# Altium PCB PCB.PcbDoc
Units mm, origin at the board's own origin, x right, y up, seen from the top; angles counter-clockwise.
Board outline 53.47 x 71.88 mm, 2 copper layers (Top Layer, Bottom Layer); 75 components, 43 nets, 242 pads, 39 vias.
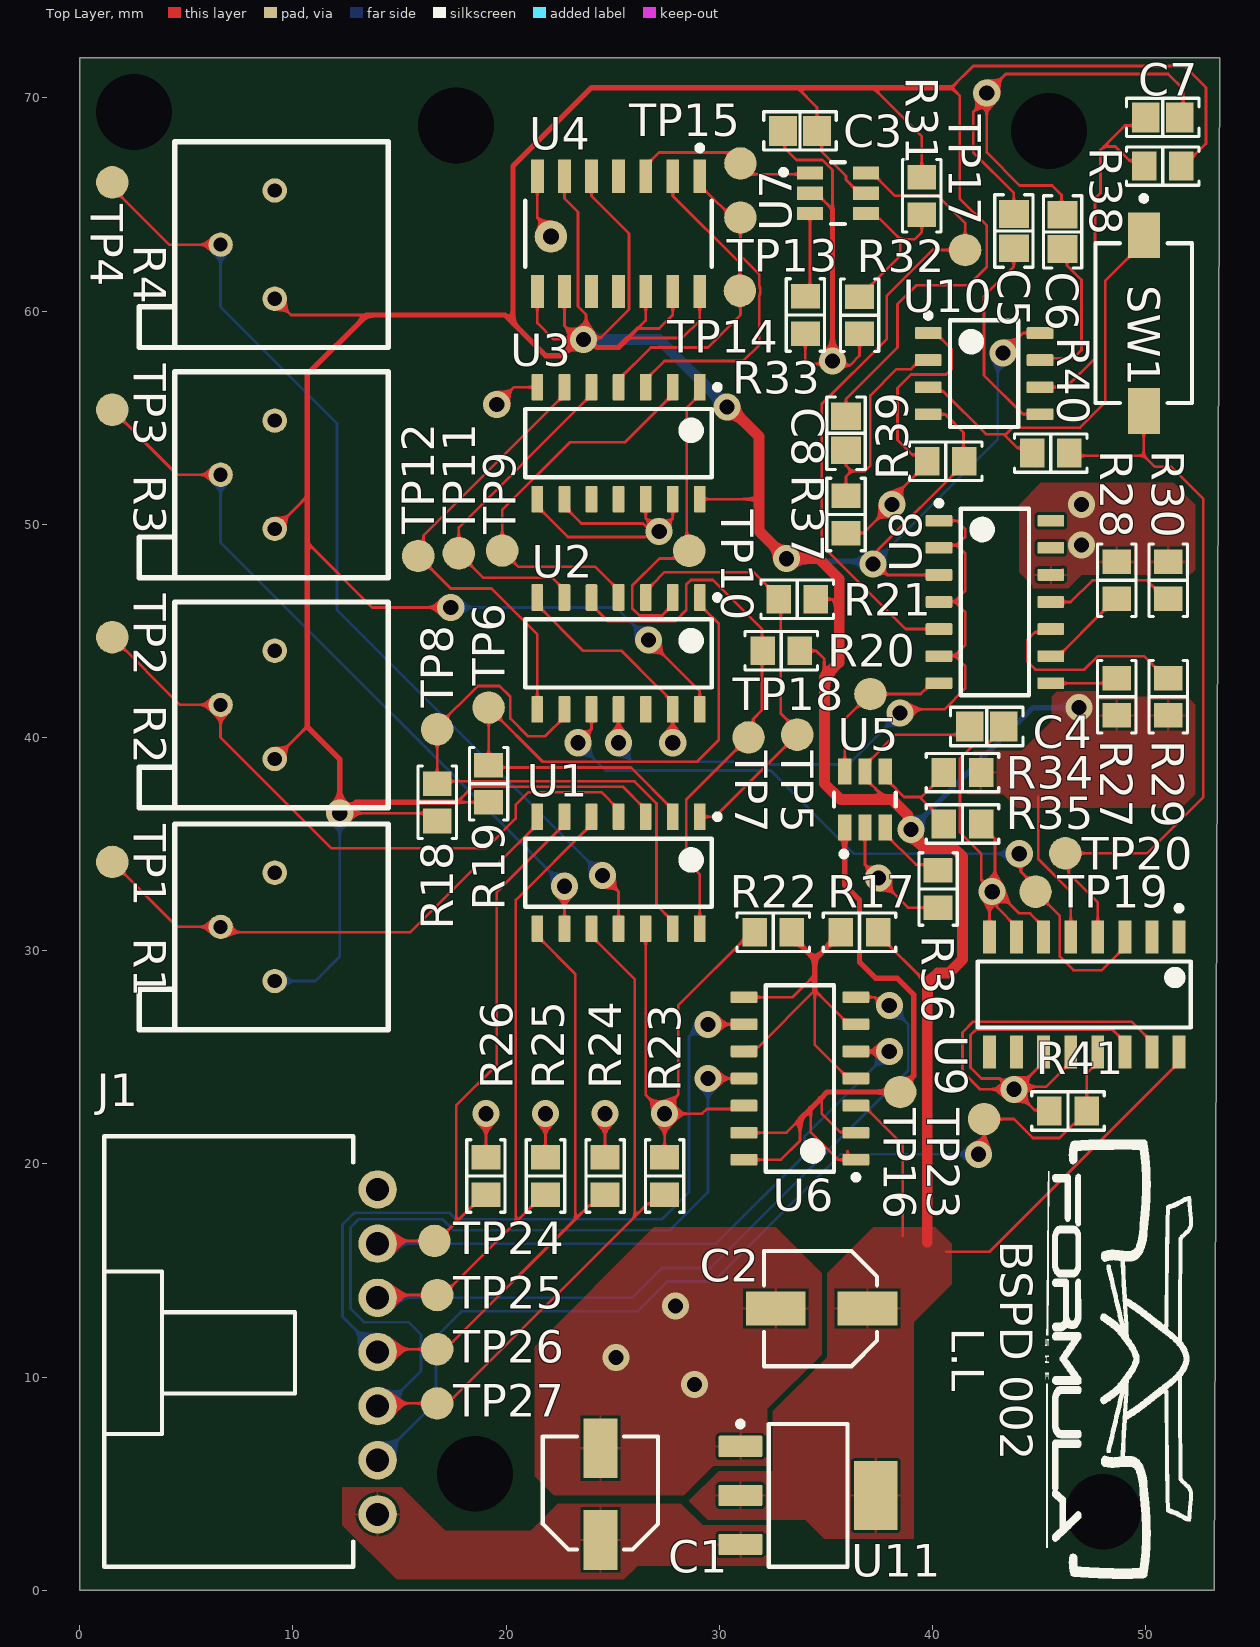
[diagram p0: Top Layer view]
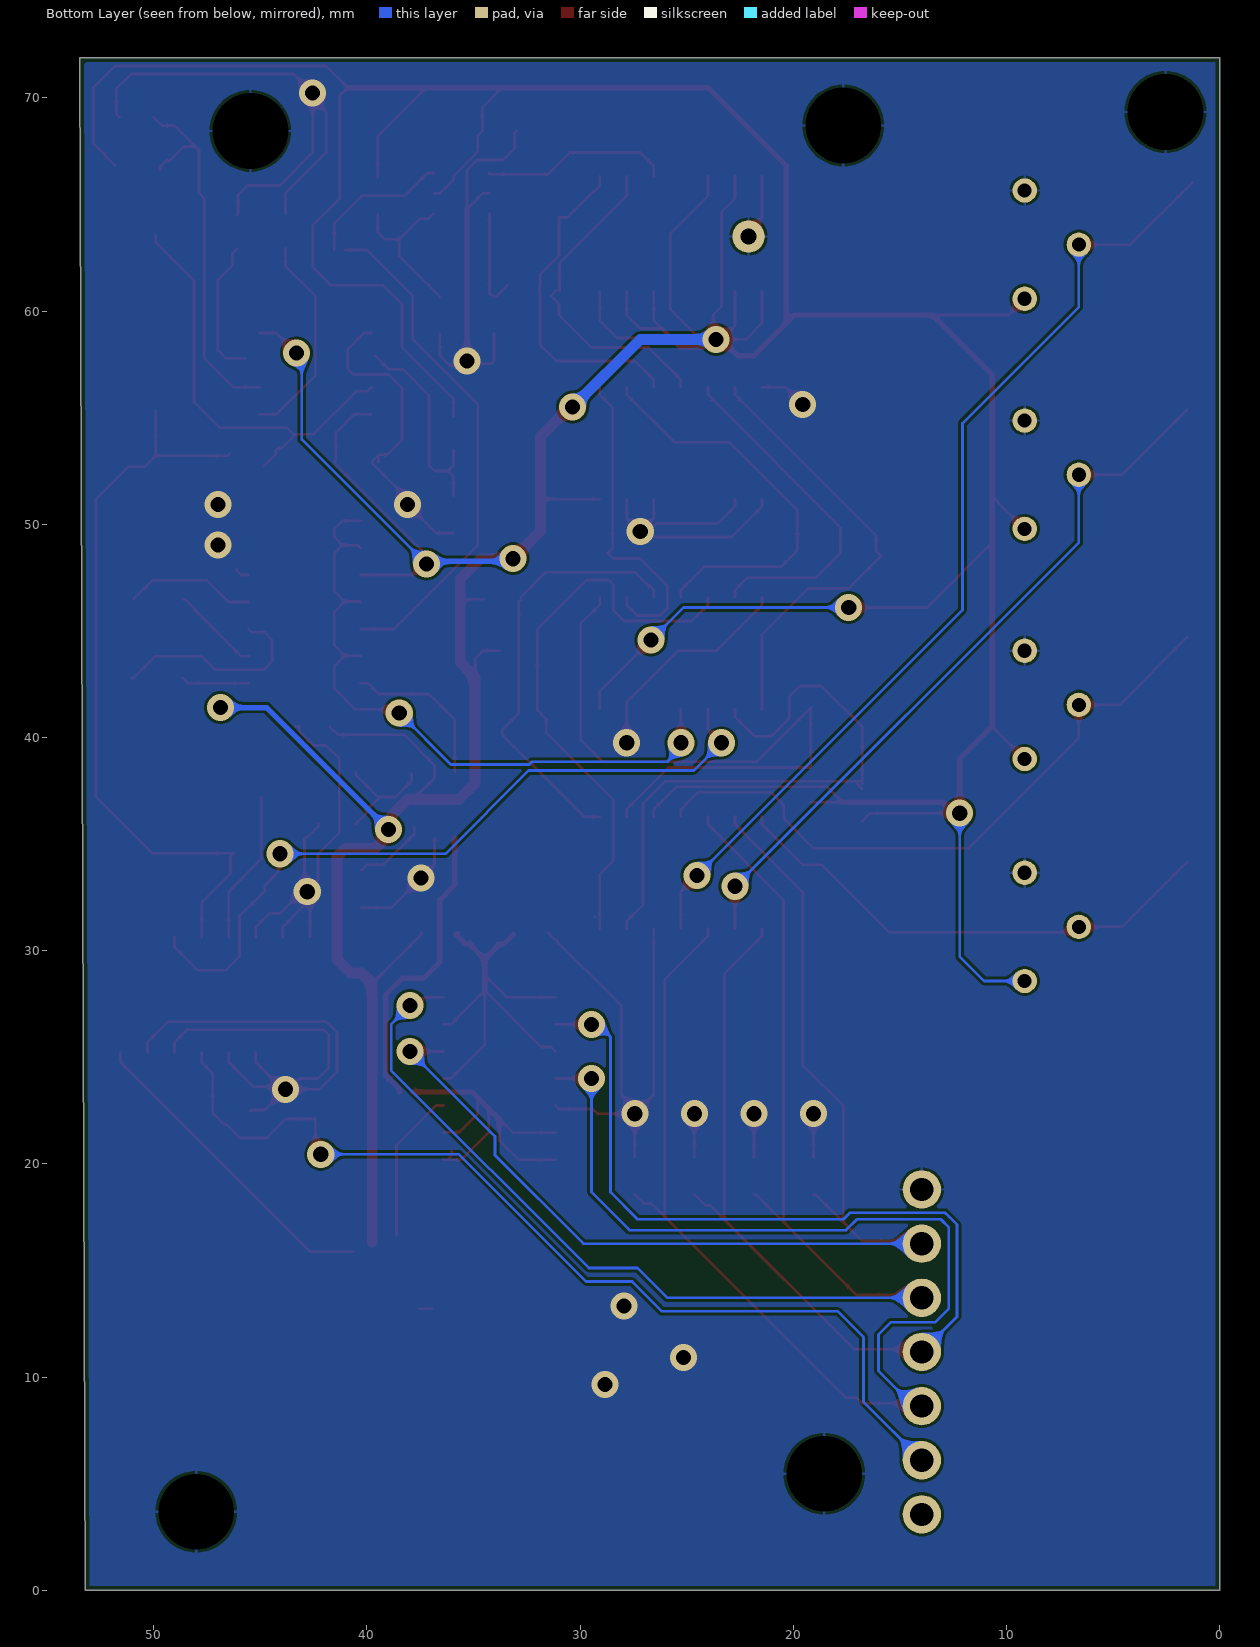
[diagram p1: Bottom Layer view, seen from below]
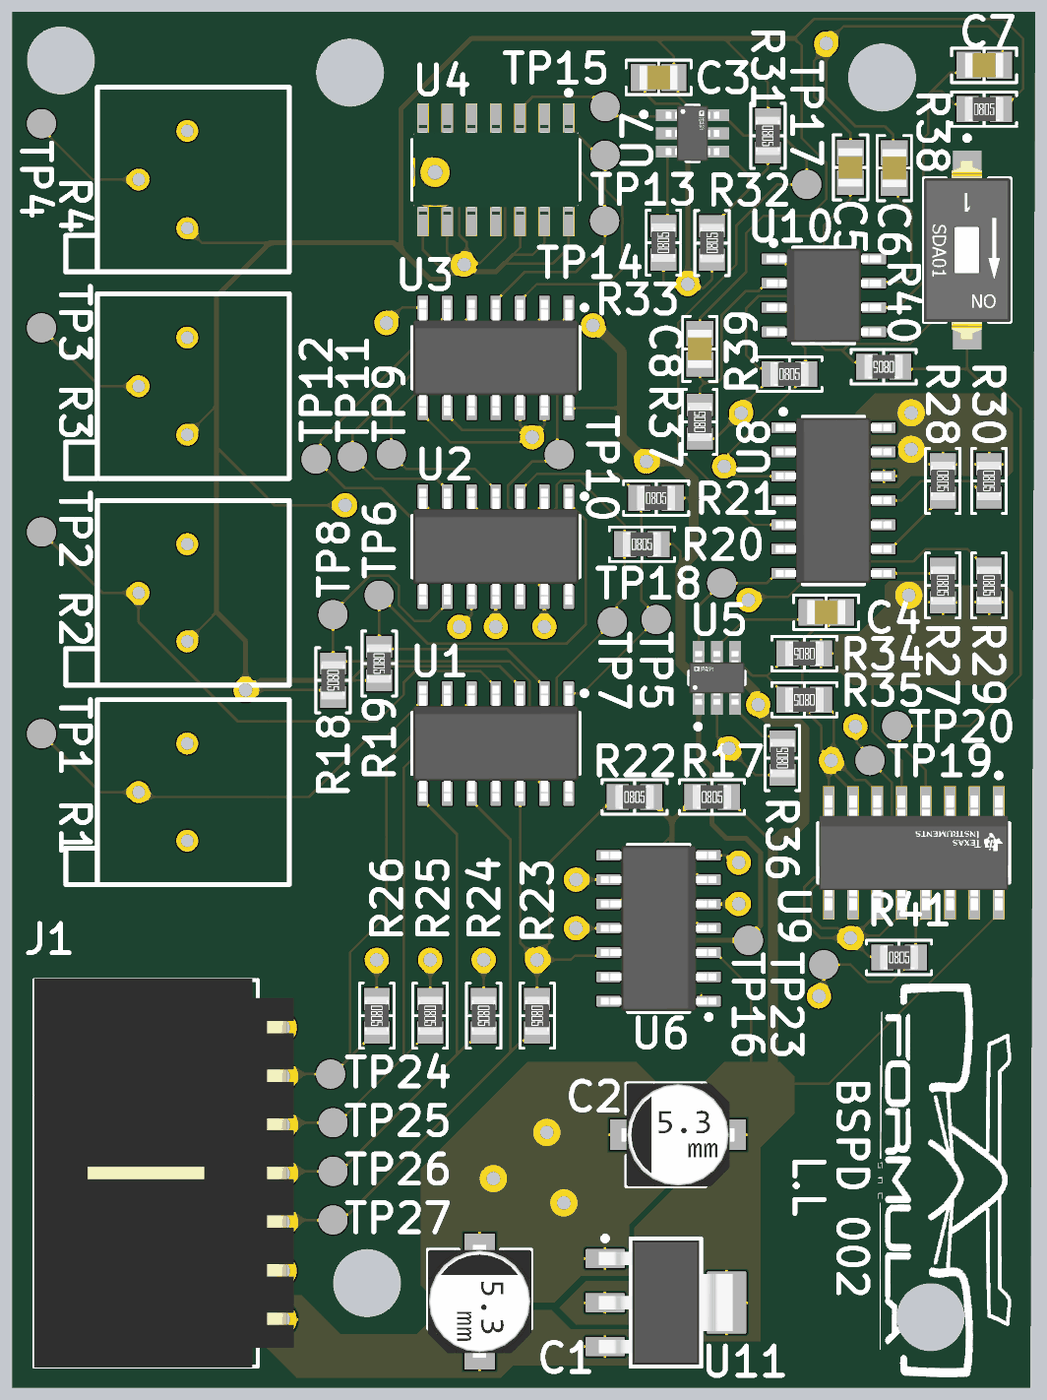
[diagram p2: 3D render of the assembled board from above, using the file's embedded part models]

## Layer stack, top to bottom
Top Solder: solder mask 0.0102, Solder Resist, Dk 3.5
Top Layer: signal copper 0.0356
Dielectric 1: dielectric 0.32, FR-4, Dk 4.8
Bottom Layer: signal copper 0.0356
Bottom Solder: solder mask 0.0102, Solder Resist, Dk 3.5

## Board outline
53.467,71.882 0,71.882 0,0 53.213,0

## Design rules (kind name [scope] priority, off if disabled: settings)
BoardOutlineClearance [All] p1: gap=0.2 ignorepadtopadclearanceinfootprint=FALSE
Clearance [All] p1: gap=0.127 ignorepadtopadclearanceinfootprint=FALSE except(0.25: Arc-Hole Track-Hole SMDPad-Hole THPad-Hole Via-Hole Fill-Hole Poly-Hole Region-Hole Text-Hole)
ComponentClearance [All] p1: gap=0.127 collisioncheckmode=3 verticalgap=0.127 showdistances=TRUE
DiffPairsRouting [All] p1: maxlimit=0.254 minlimit=0.127 mostfreqgap=0.127 toplayer_minwidth=0.127 toplayer_maxwidth=25.4 toplayer_prefwidth=0.127 bottomlayer_minwidth=0.127 bottomlayer_maxwidth=25.4 bottomlayer_prefwidth=0.127 maxuncoupledlength=12.7
Height [All] p1: minheight=0 maxheight=1816.048 prefheight=12.7
HoleSize [All] p1: absolutevalues=TRUE maxlimit=6.3 minlimit=0.3 maxpercent=80.000 minpercent=20.000
HoleToHoleClearance [All] p1: gap=0.25 allowstackedmicrovias=FALSE
MinimumAnnularRing [All] p1: minimumring=0.076
MinimumSolderMaskSliver [All] p1: minsoldermaskwidth=0
PlaneClearance [All] p1: clearance=0.127
PlaneConnect PlaneConnectPowerPads [InPadClass('PowerPads')] p1: planeconnectstyle=Direct reliefexpansion=0.508 reliefentries=4 reliefconductorwidth=0.254 reliefairgap=0.254
PlaneConnect [All] p2: pad.planeconnectstyle=Relief pad.reliefexpansion=0.3 pad.reliefentries=4 pad.reliefconductorwidth=0.127 pad.reliefairgap=0.127 via.planeconnectstyle=Direct via.reliefexpansion=0.3 via.reliefentries=4 via.reliefconductorwidth=0.127 via.reliefairgap=0.127
PolygonConnect PolygonConnectPowerPads [All vs (InPadClass('PowerPads'))] p1: connectstyle=Direct reliefconductorwidth=0.254 reliefentries=4 polygonreliefangle="90 Angle" airgapwidth=0.254
PolygonConnect [All] p2: thpad.connectstyle=Relief thpad.reliefconductorwidth=0.127 thpad.reliefentries=4 thpad.polygonreliefangle="90 Angle" thpad.airgapwidth=0.127 smdpad.connectstyle=Relief smdpad.reliefconductorwidth=0.127 smdpad.reliefentries=4 smdpad.polygonreliefangle="90 Angle" smdpad.airgapwidth=0.127 via.connectstyle=Direct via.reliefconductorwidth=0.127 via.reliefentries=4 via.polygonreliefangle="90 Angle" via.airgapwidth=0.127
RoutingVias [All] p1: holewidth=0.3 width=0.6 viastyle="Through Hole" minholewidth=0.3 minwidth=0.6 maxholewidth=0.6 maxwidth=6.6
SilkToSilkClearance [All] p1: silktosilkclearance=0
SilkToSolderMaskClearance [IsPad] p1: minsilkscreentomaskgap=0.127 clearancetoexposedcopper=TRUE
SolderMaskExpansion [All] p1: expansion=0.075 istentingtop=FALSE
Width [All] p1: maxlimit=25.4 minlimit=0.127 preferedwidth=0.127 minimp=50.000000 maximp=50.000000 favimp=50.000000
20 further rules are at their usual default settings.

## Components (designator, comment, footprint, x,y, rotation, side; value= is the part's Value field where it differs from the comment)
C1 "10µF" "CAP ALSMD 5.3MM H5.4MM" 24.422,4.508 r90 top
C2 "10µF" "CAP ALSMD 5.3MM H5.4MM" 34.798,13.208 r180 top
C3 "0.1µF" "CAP 0805_2012" 33.782,68.453 r0 top
C4 "0.1µF" "CAP 0805_2012" 42.545,40.513 r180 top
C5 "0.1µF" "CAP 0805_2012" 43.815,63.754 r270 top
C6 "4.7µF" "CAP 0805_2012" 46.101,63.716 r90 top
C7 "4.7µF" "CAP 0805_2012" 50.8,69.088 r0 top
C8 "1µF" "CAP 0805_2012" 35.941,54.273 r90 top
J1 "0705530006" "MOLEX SDA-70553-7PIN" 7.747,11.176 r90 top
R1 "3296P-1-503LF" 3296P-1-503LF-Footprint-1 9.144,28.575 r0 top
R2 "3296P-1-503LF" 3296P-1-503LF-Footprint-1 9.144,38.989 r0 top
R3 "3296P-1-503LF" 3296P-1-503LF-Footprint-1 9.144,49.784 r0 top
R4 "3296P-1-503LF" 3296P-1-503LF-Footprint-1 9.144,60.579 r0 top
R17 "499 kOhms" "RES 0805_2012" 36.576,30.861 r0 top
R18 "30 kOhms" "RES 0805_2012" 16.764,36.957 r270 top
R19 "30 kOhms" "RES 0805_2012" 19.177,37.832 r270 top
R20 "30 kOhms" "RES 0805_2012" 32.907,44.069 r0 top
R21 "30 kOhms" "RES 0805_2012" 33.655,46.482 r0 top
R22 "2 kOhms" "RES 0805_2012" 32.526,30.861 r0 top
R23 "1 kOhms" "RES 0805_2012" 27.432,19.431 r270 top net-tie
R24 "1 kOhms" "RES 0805_2012" 24.638,19.431 r270 top net-tie
R25 "1 kOhms" "RES 0805_2012" 21.844,19.431 r270 top net-tie
R26 "1 kOhms" "RES 0805_2012" 19.05,19.431 r270 top net-tie
R27 "10 kOhms" "RES 0805_2012" 48.641,41.91 r270 top
R28 "10 kOhms" "RES 0805_2012" 48.641,47.371 r270 top
R29 "10 kOhms" "RES 0805_2012" 51.054,41.91 r270 top
R30 "10 kOhms" "RES 0805_2012" 51.054,47.371 r270 top
R31 "1M" "RES 0805_2012" 39.497,65.405 r270 top
R32 "681k" "RES 0805_2012" 36.576,59.803 r90 top
R33 "191 kOhms" "RES 0805_2012" 34.036,59.817 r90 top
R34 "1M" "RES 0805_2012" 41.402,38.354 r180 top
R35 "523k" "RES 0805_2012" 41.402,35.941 r180 top
R36 "154 kOhms" "RES 0805_2012" 40.259,32.893 r90 top
R37 "10 kOhms" "RES 0805_2012" 35.941,50.463 r90 top
R38 "10 kOhms" "RES 0805_2012" 50.8,66.802 r0 top
R39 "10 kOhms" "RES 0805_2012" 40.622,52.959 r0 top
R40 "1 kOhms" "RES 0805_2012" 45.548,53.34 r180 top net-tie
R41 "10 kOhms" "RES 0805_2012" 46.355,22.479 r0 top
SW1 "SDA01H1SBD" FP-SDA01H1SBD-MFG 49.911,59.436 r180 top
TP1 "Test Point" TP1 1.524,34.163 r90 top
TP2 "Test Point" TP1 1.524,44.704 r0 top
TP3 "Test Point" TP1 1.524,55.372 r90 top
TP4 "Test Point" TP1 1.524,66.04 r0 top
TP5 "Test Point" TP1 33.655,40.132 r90 top
TP6 "Test Point" TP1 19.177,41.402 r90 top
TP7 "Test Point" TP1 31.369,40.005 r90 top
TP8 "Test Point" TP1 16.764,40.386 r90 top
TP9 "Test Point" TP1 19.812,48.768 r180 top
TP10 "Test Point" TP1 28.588,48.755 r90 top
TP11 "Test Point" TP1 17.78,48.641 r90 top
TP12 "Test Point" TP1 15.875,48.514 r90 top
TP13 "Test Point" TP1 30.988,64.389 r90 top
TP14 "Test Point" TP1 30.962,60.96 r90 top
TP15 "Test Point" TP1 30.988,66.929 r90 top
TP16 "Test Point" TP1 38.481,23.368 r90 top
TP17 "Test Point" TP1 41.529,62.865 r90 top
TP18 "Test Point" TP1 37.084,42.037 r270 top
TP19 "Test Point" TP1 44.831,32.766 r90 top
TP20 "Test Point" TP1 46.228,34.567 r90 top
TP23 "Test Point" TP1 42.418,22.098 r90 top
TP24 "Test Point" TP1 16.637,16.383 r180 top
TP25 "Test Point" TP1 16.764,13.843 r180 top
TP26 "Test Point" TP1 16.764,11.303 r180 top
TP27 "Test Point" TP1 16.764,8.763 r180 top
U1 "LP339M/NOPB" D0014A_L 25.273,33.655 r270 top
U2 "SN74LS04D" D0014A_L 25.273,43.942 r270 top
U3 "CD4071BM96" D0014A_L 25.273,53.806 r270 top
U4 "CD4081BM96" FP-D0014A-MFG 25.273,63.627 r270 top
U5 "LTC6994CS6-1#TRMPBF" FP-S6-6-05-08-1636-MFG 36.83,37.084 r90 top
U6 "LP339M/NOPB" D0014A_L 33.782,24.003 r180 top
U7 "LTC6994CS6-1#TRMPBF" FP-S6-6-05-08-1636-MFG 35.56,65.532 r0 top
U8 "LP339M/NOPB" D0014A_L 42.926,46.355 r0 top
U9 "CD4044BNSR" FP-D0016A-MFG 47.117,27.94 r270 top
U10 "LM555CM" D0008A_L 42.418,57.067 r0 top
U11 "LM1117MPX-5.0/NOPB" DCY0004A_M 34.163,4.445 r0 top

## Footprints (in the part's own frame and the unit in brackets; to place one, negate y for a bottom-side part, rotate by r counter-clockwise, add the part's x,y. Pads: shape width x height; smd on the part's side, far side on the other; paste and mask are expansions set on the pad)
3296P-1-503LF-Footprint-1 [mil] "Chip Resistor, 2-Leads, Body 2.00x1.25mm, IPC Medium Density"
  round 45 hole 26: 1(0,0) 2(-100,100) 3(0,200)
  silkscreen extent -250,-90 210,290, body extent -245,-90 210,290, height 190
"CAP 0805_2012" [mm] "Chip Capacitor, 2-Leads, Body 2.00x1.20mm, IPC Medium Density"
  rect 1.3x1.4 smd: 1(-0.8,0) 2(0.8,0)
  silkscreen extent -1.7,-0.9 1.7,0.9, body extent -1,-0.64 1,0.64, height 1.26
"CAP ALSMD 5.3MM H5.4MM" [mm] "Aluminum Electrolytic Capacitor, Body 5.30x5.30x5.40mm, IPC Low Density"
  rect 2.8x1.6 smd: 1(-2.15,0) 2(2.15,0)
  silkscreen extent -2.6,-2.7 2.7,2.7, body extent -2.95,-2.7 2.95,2.7, height 5.4
D0008A_L [mm] "SOIC, 8-Leads, Body 5x4mm, Pitch 1.27mm, IPC High Density"
  rrect18% 1.25x0.55 smd: 1(-2.625,1.905) 2(-2.625,0.635) 3(-2.625,-0.635) 4(-2.625,-1.905) 5(2.625,-1.905) 6(2.625,-0.635) 7(2.625,0.635) 8(2.625,1.905)
  silkscreen extent -2.75,-2.5 1.6,2.85, body extent -3,-2.45 3,2.45, height 1.63
D0014A_L [mm] "SOIC, 14-Leads, Body 8.75x4mm, Pitch 1.27mm, IPC High Density"
  rrect18% 1.25x0.55 smd: 1(-2.625,3.81) 2(-2.625,2.54) 3(-2.625,1.27) 4(-2.625,0) 5(-2.625,-1.27) 6(-2.625,-2.54) 7(-2.625,-3.81) 8(2.625,-3.81) 9(2.625,-2.54) 10(2.625,-1.27) 11(2.625,0) 12(2.625,1.27) 13(2.625,2.54) 14(2.625,3.81)
  silkscreen extent -2.75,-4.38 1.6,4.76, body extent -3.02,-4.32 3.02,4.32, height 1.59
DCY0004A_M [mm] "SOT223, 4-Leads, Body 6.7x3.7mm, Pitch 2.3mm, IPC Low Density"
  rrect10% 2.05x1 smd: 1(-3.175,2.3) 2(-3.175,0) 3(-3.175,-2.3)
  rrect5% 2.05x3.25 smd: 4(3.175,0)
  silkscreen extent -3.3,-3.35 1.85,3.47, body extent -3.5,-3.25 3.5,3.25, height 1.62
FP-D0014A-MFG [mm]
  rect 1.55x0.6 smd paste-1000 mask+0: 1(-2.7,3.81) 2(-2.7,2.54) 3(-2.7,1.27) 4(-2.7,0) 5(-2.7,-1.27) 6(-2.7,-2.54) 7(-2.7,-3.81) 8(2.7,-3.81) 9(2.7,-2.54) 10(2.7,-1.27) 11(2.7,0) 12(2.7,1.27) 13(2.7,2.54) 14(2.7,3.81)
  silkscreen extent -4.15,-4.38 1.55,4.38, body extent -3.57,-4.62 3.57,4.62, height 0.25
FP-D0016A-MFG [mm]
  rect 1.55x0.6 smd paste-1000 mask+0: 1(-2.7,4.445) 2(-2.7,3.175) 3(-2.7,1.905) 4(-2.7,0.635) 5(-2.7,-0.635) 6(-2.7,-1.905) 7(-2.7,-3.175) 8(-2.7,-4.445) 9(2.7,-4.445) 10(2.7,-3.175) 11(2.7,-1.905) 12(2.7,-0.635) 13(2.7,0.635) 14(2.7,1.905) 15(2.7,3.175) 16(2.7,4.445)
  silkscreen extent -4.17,-5 1.55,5, body extent -3.57,-5.25 3.57,5.25, height 0.25
FP-S6-6-05-08-1636-MFG [mm]
  rect 1.22x0.62 smd paste+0 mask+0: 1(-1.31,0.95) 2(-1.31,0) 3(-1.31,-0.95) 4(1.31,-0.95) 5(1.31,0) 6(1.31,0.95)
  silkscreen extent -2.67,-1.45 0.33,1.45, body extent -2.02,-1.68 2.02,1.68, height 0.25
FP-SDA01H1SBD-MFG [mil]
  rect 59x84.5 smd paste+0 mask+0: 1(0,-162.25) 2(0,162.25)
  silkscreen extent -89,-235 89,148, body extent -93,-208 93,208, height 10
"MOLEX SDA-70553-7PIN" [mm] "SL Right angle header with latch, 0.100 centres, SDA-70553"
  round 1.8 hole 1.09: 1(-7.62,-6.223) 2(-5.08,-6.223) 3(-2.54,-6.223) 4(0,-6.223) 5(2.54,-6.223) 6(5.08,-6.223) 7(7.62,-6.223)
  silkscreen extent -10.07,-5.08 10.12,6.6, body extent -10.12,-6.97 10.2,6.62, height 6.96
"RES 0805_2012" [mm] "Chip Resistor, 2-Leads, Body 2.00x1.25mm, IPC Medium Density"
  rect 1.15x1.35 smd: 1(-0.875,0) 2(0.875,0)
  silkscreen extent -1.7,-0.9 1.7,0.9, body extent -1,-0.62 1,0.63, height 0.6
TP1 [mil] "60 mil radius test point"
  round 60 smd: 1(0,0)

## Part data
C1 C2: library part EEE-1HA100WR, "CAP ALUM 10UF 20% 50V SMD", Device Package="Radial, Can - SMD", Lifetime @ Temp.="1000 Hrs @ 85°C", Manufacturer="Panasonic Electronic Components", Operating Temperature="-40°C ~ 85°C", Ratings=AEC-Q200, Ripple Current @ High Frequency="45.9mA @ 10kHz", Ripple Current @ Low Frequency="27mA @ 120Hz", Supplier Part Number 1=PCE3915CT-ND, Tolerance=±20%, Voltage - Rated=50V, Applications=Automotive, Capacitance=10µF, ComponentLink1Description=Datasheet, ComponentLink1URL=//media.digikey.com/pdf/Data%20Sheets/Panasonic%20Electronic%20Components/S_Series,Type_V_Rev2018.pdf, ComponentLink2Description="DigiKey Link", ComponentLink2URL=http://digikey.com/product-detail/en/panasonic-electronic-components/EEE-1HA100WR/PCE3915CT-ND/766291, Height - Seated (Max)="0.213\" (5.40mm)", LastUpdated="2020-09-02 1:25:23 AM", Lifecycle Status=Active, Minimum Order=1, Mounting Type="Surface Mount", Package / Case="Radial, Can - SMD", Packaging=TapeAndReel, Part Number=EEE-1HA100WR, Part Status=Active, PartId=7969, Polarization=Polar, Price=0.08, Series=S, Size / Dimension="0.197\" Dia (5.00mm)", Supplier 1=DigiKey, Surface Mount Land Size="0.209\" L x 0.209\" W (5.30mm x 5.30mm)"
C3 C4 C5: library part VJ0805Y104KXXCW1BC, "CAP CER 0.1UF 25V X7R 0805", Device Package="0805 (2012 Metric)", Manufacturer="Vishay Vitramon", Operating Temperature="-55°C ~ 125°C", Supplier Part Number 1=720-1537-1-ND, Temperature Coefficient=X7R, Tolerance=±10%, Voltage - Rated=25V, Applications="General Purpose", Capacitance=0.1µF, ComponentLink1Description=Datasheet, ComponentLink1URL=https://www.vishay.com/docs/28548/vjw1bcbascomseries.pdf, ComponentLink2Description="DigiKey Link", ComponentLink2URL=http://digikey.com/product-detail/en/vishay-vitramon/VJ0805Y104KXXCW1BC/720-1537-1-ND/421056, LastUpdated="2020-09-02 1:04:08 AM", Lifecycle Status=Active, Minimum Order=1, Mounting Type="Surface Mount, MLCC", Package / Case="0805 (2012 Metric)", Packaging=TapeAndReel, Part Number=VJ0805Y104KXXCW1BC, Part Status=Active, PartId=17950, Price=0.05, Series=VJ, Size / Dimension="0.079\" L x 0.049\" W (2.00mm x 1.25mm)", Supplier 1=DigiKey, Thickness (Max)="0.037\" (0.95mm)"
C6 C7: library part TMK212BBJ475KD-T, "CAP CER 4.7UF 25V X5R 0805", Device Package="0805 (2012 Metric)", Manufacturer="Taiyo Yuden", Operating Temperature="-55°C ~ 85°C", Supplier Part Number 1=587-2992-1-ND, Temperature Coefficient=X5R, Tolerance=±10%, Voltage - Rated=25V, Applications="General Purpose", Capacitance=4.7µF, ComponentLink1Description=Datasheet, ComponentLink1URL=https://www.yuden.co.jp/productdata/catalog/mlcc01_e.pdf, ComponentLink2Description="DigiKey Link", ComponentLink2URL=http://digikey.com/product-detail/en/taiyo-yuden/TMK212BBJ475KD-T/587-2992-1-ND/2714185, LastUpdated="2020-09-02 1:04:10 AM", Lifecycle Status=Active, Minimum Order=1, Mounting Type="Surface Mount, MLCC", Package / Case="0805 (2012 Metric)", Packaging=TapeAndReel, Part Number=TMK212BBJ475KD-T, Part Status=Active, PartId=17055, Price=0.05, Series=M, Size / Dimension="0.079\" L x 0.049\" W (2.00mm x 1.25mm)", Supplier 1=DigiKey, Thickness (Max)="0.037\" (0.95mm)"
C8: library part VJ0805Y105KXXTW1BC, "CAP CER 1UF 25V X7R 0805", Device Package="0805 (2012 Metric)", Manufacturer="Vishay Vitramon", Operating Temperature="-55°C ~ 125°C", Supplier Part Number 1=720-1855-1-ND, Temperature Coefficient=X7R, Tolerance=±10%, Voltage - Rated=25V, Applications="General Purpose", Capacitance=1µF, ComponentLink1Description=Datasheet, ComponentLink1URL=http://www.vishay.com/docs/28548/vjw1bcbascomseries.pdf, ComponentLink2Description="DigiKey Link", ComponentLink2URL=http://digikey.com/product-detail/en/vishay-vitramon/VJ0805Y105KXXTW1BC/720-1855-1-ND/9681499, LastUpdated="2020-09-02 1:04:16 AM", Lifecycle Status=Active, Minimum Order=1, Mounting Type="Surface Mount, MLCC", Package / Case="0805 (2012 Metric)", Packaging=TapeAndReel, Part Number=VJ0805Y105KXXTW1BC, Part Status=Active, PartId=15348, Price=0.03, Series=VJ, Size / Dimension="0.079\" L x 0.049\" W (2.00mm x 1.25mm)", Supplier 1=DigiKey, Thickness (Max)="0.053\" (1.35mm)"
J1: "CONN HEADER R/A 7POS 2.54MM", Insulation Color=Black, Manufacturer=Molex, Material Flammability Rating="UL94 V-0", Operating Temperature="-40°C ~ 105°C", Supplier Part Number 1=WM4905-ND, Voltage Rating=250V, ComponentLink1Description=Datasheet, ComponentLink1URL=https://www.molex.com/pdm_docs/sd/705530006_sd.pdf, ComponentLink2Description="DigiKey Link", ComponentLink2URL=http://digikey.com/product-detail/en/molex/0705530006/WM4905-ND/114971, Connector Type=Header, Contact Finish - Mating=Gold, Contact Finish - Post=Tin, Contact Finish Thickness - Mating="15.0µin (0.38µm)", Contact Length - Mating="0.240\" (6.10mm)", Contact Length - Post="0.130\" (3.30mm)", Contact Material="Phosphor Bronze", Contact Shape=Square, Contact Type="Male Pin", Fastening Type="Latch Holder", Insulation Height="0.215\" (5.45mm)", Insulation Material="Polyester, Glass Filled", LastUpdated="2020-01-12 11:57:03 PM", Lifecycle Status=Active, Minimum Order=1, Mounting Type="Through Hole, Right Angle", Number of Positions=7, Number of Positions Loaded=All, Number of Rows=1, Packaging=Tube, Part Number=0705530006, Part Status=Active, PartId=90, Pitch - Mating="0.100\" (2.54mm)", Price=3.15, Series="SL 70553", Shrouding="Shrouded - 4 Wall", Style="Board to Cable/Wire", Supplier 1=DigiKey, Termination=Solder
R1 R2 R3 R4: library part CMP-00000-2, "50k 10% Trimmer Potentiometer 25-Turn Cermet", Color=Blue, Max Operating Temperature=125°C, Max Power Dissipation=500mW, Min Operating Temperature=-55°C, Package Quantity=50, Resistance=50kR, Resistance Tolerance=10%, Resistor Type=Cermet, Temperature Coefficient=100ppm/°C, Depth=11.55mm, Height=0.19inch, Lead Free="Lead Free", Length=9.53mm, Military Standard=Not, Mount="Panel,Through Hole,PCB", Number of Turns=25, Packaging=Rail/Tube, Power Rating=500mW, Radiation Hardening=No, REACH SVHC="No SVHC", RoHS Compliant=Yes, Series=3296, Taper=Linear, Technology=CERMET, Termination=Pin, Tolerance=10%, Weight=0.03oz, Width=9.53mm
R17: library part RC0805FR-07499KL, "RES SMD 499K OHM 1% 1/8W 0805", Device Package="0805 (2012 Metric)", Manufacturer=Yageo, Operating Temperature="-55°C ~ 155°C", Power (Watts)="0.125W, 1/8W", Supplier Device Package=0805, Supplier Part Number 1=311-499KCRCT-ND, Temperature Coefficient=±100ppm/°C, Tolerance=±1%, ComponentLink1Description=Datasheet, ComponentLink1URL=https://www.yageo.com/upload/media/product/productsearch/datasheet/rchip/PYu-RC_Group_51_RoHS_L_10.pdf, ComponentLink2Description="DigiKey Link", ComponentLink2URL=http://digikey.com/product-detail/en/yageo/RC0805FR-07499KL/311-499KCRCT-ND/730934, Composition="Thick Film", Features="Moisture Resistant", Height - Seated (Max)="0.024\" (0.60mm)", LastUpdated="2020-09-02 1:14:58 AM", Lifecycle Status=Active, Minimum Order=1, Number of Terminations=2, Package / Case="0805 (2012 Metric)", Packaging=CutTape, Part Number=RC0805FR-07499KL, Part Status=Active, PartId=39438, Price=0.10, Resistance="499 kOhms", Series=RC, Size / Dimension="0.079\" L x 0.049\" W (2.00mm x 1.25mm)", Supplier 1=DigiKey
R18 R19 R20 R21: library part RT0805DRD0730KL, "RES SMD 30K OHM 0.5% 1/8W 0805", Device Package="0805 (2012 Metric)", Manufacturer=Yageo, Operating Temperature="-55°C ~ 155°C", Power (Watts)="0.125W, 1/8W", Supplier Device Package=0805, Supplier Part Number 1=311-2734-1-ND, Temperature Coefficient=±25ppm/°C, Tolerance=±0.5%, ComponentLink1Description=Datasheet, ComponentLink1URL=https://www.yageo.com/upload/media/product/productsearch/datasheet/rchip/PYu-RT_1-to-0.01_RoHS_L_11.pdf, ComponentLink2Description="DigiKey Link", ComponentLink2URL=http://digikey.com/product-detail/en/yageo/RT0805DRD0730KL/311-2734-1-ND/6129153, Composition="Thin Film", Height - Seated (Max)="0.024\" (0.60mm)", LastUpdated="2020-09-02 1:14:54 AM", Lifecycle Status=Active, Minimum Order=1, Number of Terminations=2, Package / Case="0805 (2012 Metric)", Packaging=TapeAndReel, Part Number=RT0805DRD0730KL, Part Status=Active, PartId=41498, Price=0.03, Resistance="30 kOhms", Series=RT, Size / Dimension="0.079\" L x 0.049\" W (2.00mm x 1.25mm)", Supplier 1=DigiKey
R22: library part RC0805FR-072KL, "RES SMD 2K OHM 1% 1/8W 0805", Device Package="0805 (2012 Metric)", Manufacturer=Yageo, Operating Temperature="-55°C ~ 155°C", Power (Watts)="0.125W, 1/8W", Supplier Device Package=0805, Supplier Part Number 1=311-2.00KCRCT-ND, Temperature Coefficient=±100ppm/°C, Tolerance=±1%, ComponentLink1Description=Datasheet, ComponentLink1URL=https://www.yageo.com/upload/media/product/productsearch/datasheet/rchip/PYu-RC_Group_51_RoHS_L_10.pdf, ComponentLink2Description="DigiKey Link", ComponentLink2URL=http://digikey.com/product-detail/en/yageo/RC0805FR-072KL/311-2.00KCRCT-ND/730611, Composition="Thick Film", Features="Moisture Resistant", Height - Seated (Max)="0.024\" (0.60mm)", LastUpdated="2020-09-02 1:14:43 AM", Lifecycle Status=Active, Minimum Order=1, Number of Terminations=2, Package / Case="0805 (2012 Metric)", Packaging=CutTape, Part Number=RC0805FR-072KL, Part Status=Active, PartId=46061, Price=0.10, Resistance="2 kOhms", Series=RC, Size / Dimension="0.079\" L x 0.049\" W (2.00mm x 1.25mm)", Supplier 1=DigiKey
R23 R24 R25 R26 R40: library part RNCS0805BKE1K00, "RES 1K OHM 0.1% 1/10W 0805", Device Package="0805 (2012 Metric)", Manufacturer="Stackpole Electronics Inc", Operating Temperature="-55°C ~ 155°C", Power (Watts)="0.1W, 1/10W", Ratings=AEC-Q200, Supplier Device Package=0805, Supplier Part Number 1=RNCS0805BKE1K00CT-ND, Temperature Coefficient=±25ppm/°C, Tolerance=±0.1%, ComponentLink1Description=Datasheet, ComponentLink1URL=https://www.seielect.com/catalog/sei-rncs_rnch.pdf, ComponentLink2Description="DigiKey Link", ComponentLink2URL=http://digikey.com/product-detail/en/stackpole-electronics-inc/RNCS0805BKE1K00/RNCS0805BKE1K00CT-ND/1800170, Composition="Thin Film", Features="Anti-Corrosive, Automotive AEC-Q200, Moisture Resistant", Height - Seated (Max)="0.026\" (0.65mm)", LastUpdated="2020-09-02 1:15:24 AM", Lifecycle Status=Active, Minimum Order=1, Number of Terminations=2, Package / Case="0805 (2012 Metric)", Packaging=TapeAndReel, Part Number=RNCS0805BKE1K00, Part Status=Active, PartId=27715, Price=0.09, Resistance="1 kOhms", Series=RNCS, Size / Dimension="0.079\" L x 0.049\" W (2.00mm x 1.25mm)", Supplier 1=DigiKey
R27 R28 R29 R30 R37 R38 R39 R41: library part RC0805FR-0710KL, "RES SMD 10K OHM 1% 1/8W 0805", Device Package="0805 (2012 Metric)", Manufacturer=Yageo, Operating Temperature="-55°C ~ 155°C", Power (Watts)="0.125W, 1/8W", Supplier Device Package=0805, Supplier Part Number 1=311-10.0KCRCT-ND, Temperature Coefficient=±100ppm/°C, Tolerance=±1%, ComponentLink1Description=Datasheet, ComponentLink1URL=https://www.yageo.com/upload/media/product/productsearch/datasheet/rchip/PYu-RC_Group_51_RoHS_L_10.pdf, ComponentLink2Description="DigiKey Link", ComponentLink2URL=http://digikey.com/product-detail/en/yageo/RC0805FR-0710KL/311-10.0KCRCT-ND/730482, Composition="Thick Film", Features="Moisture Resistant", Height - Seated (Max)="0.024\" (0.60mm)", LastUpdated="2020-09-02 1:14:43 AM", Lifecycle Status=Active, Minimum Order=1, Number of Terminations=2, Package / Case="0805 (2012 Metric)", Packaging=CutTape, Part Number=RC0805FR-0710KL, Part Status=Active, PartId=46046, Price=0.10, Resistance="10 kOhms", Series=RC, Size / Dimension="0.079\" L x 0.049\" W (2.00mm x 1.25mm)", Supplier 1=DigiKey
R31 R34: library part RC0805FR-071ML, "RES SMD 1M OHM 1% 1/8W 0805", Device Package="0805 (2012 Metric)", Manufacturer=Yageo, Operating Temperature="-55°C ~ 155°C", Power (Watts)="0.125W, 1/8W", Resistance="1 MOhms", Supplier Device Package=0805, Supplier Part Number 1=311-1.00MCRCT-ND, Temperature Coefficient=±100ppm/°C, Tolerance=±1%, ComponentLink1Description=Datasheet, ComponentLink1URL=https://www.yageo.com/upload/media/product/productsearch/datasheet/rchip/PYu-RC_Group_51_RoHS_L_10.pdf, ComponentLink2Description="DigiKey Link", ComponentLink2URL=http://digikey.com/product-detail/en/yageo/RC0805FR-071ML/311-1.00MCRCT-ND/730392, Composition="Thick Film", Features="Moisture Resistant", Height - Seated (Max)="0.024\" (0.60mm)", LastUpdated="2020-09-02 1:14:43 AM", Lifecycle Status=Active, Minimum Order=1, Number of Terminations=2, Package / Case="0805 (2012 Metric)", Packaging=CutTape, Part Number=RC0805FR-071ML, Part Status=Active, PartId=46052, Price=0.10, Series=RC, Size / Dimension="0.079\" L x 0.049\" W (2.00mm x 1.25mm)", Supplier 1=DigiKey
R32: library part RMCF0805FT681K, "RES 681K OHM 1% 1/8W 0805", Device Package="0805 (2012 Metric)", Manufacturer="Stackpole Electronics Inc", Operating Temperature="-55°C ~ 155°C", Power (Watts)="0.125W, 1/8W", Ratings=AEC-Q200, Resistance="681 kOhms", Supplier Device Package=0805, Supplier Part Number 1=RMCF0805FT681KCT-ND, Temperature Coefficient=±100ppm/°C, Tolerance=±1%, ComponentLink1Description=Datasheet, ComponentLink1URL=https://www.seielect.com/catalog/sei-rmcf_rmcp.pdf, ComponentLink2Description="DigiKey Link", ComponentLink2URL=http://digikey.com/product-detail/en/stackpole-electronics-inc/RMCF0805FT681K/RMCF0805FT681KCT-ND/1942525, Composition="Thick Film", Features="Automotive AEC-Q200", Height - Seated (Max)="0.026\" (0.65mm)", LastUpdated="2020-09-02 1:15:15 AM", Lifecycle Status=Active, Minimum Order=1, Number of Terminations=2, Package / Case="0805 (2012 Metric)", Packaging=CutTape, Part Number=RMCF0805FT681K, Part Status=Active, PartId=31690, Price=0.10, Series=RMCF, Size / Dimension="0.079\" L x 0.049\" W (2.00mm x 1.25mm)", Supplier 1=DigiKey
R33: library part RC0805FR-07191KL, "RES SMD 191K OHM 1% 1/8W 0805", Device Package="0805 (2012 Metric)", Manufacturer=Yageo, Operating Temperature="-55°C ~ 155°C", Power (Watts)="0.125W, 1/8W", Supplier Device Package=0805, Supplier Part Number 1=311-191KCRCT-ND, Temperature Coefficient=±100ppm/°C, Tolerance=±1%, ComponentLink1Description=Datasheet, ComponentLink1URL=https://www.yageo.com/upload/media/product/productsearch/datasheet/rchip/PYu-RC_Group_51_RoHS_L_10.pdf, ComponentLink2Description="DigiKey Link", ComponentLink2URL=http://digikey.com/product-detail/en/yageo/RC0805FR-07191KL/311-191KCRCT-ND/730607, Composition="Thick Film", Features="Moisture Resistant", Height - Seated (Max)="0.024\" (0.60mm)", LastUpdated="2020-09-02 1:15:03 AM", Lifecycle Status=Active, Minimum Order=1, Number of Terminations=2, Package / Case="0805 (2012 Metric)", Packaging=CutTape, Part Number=RC0805FR-07191KL, Part Status=Active, PartId=37104, Price=0.10, Resistance="191 kOhms", Series=RC, Size / Dimension="0.079\" L x 0.049\" W (2.00mm x 1.25mm)", Supplier 1=DigiKey
R35: library part RC0805FR-07523KL, "RES SMD 523K OHM 1% 1/8W 0805", Device Package="0805 (2012 Metric)", Manufacturer=Yageo, Operating Temperature="-55°C ~ 155°C", Power (Watts)="0.125W, 1/8W", Resistance="523 kOhms", Supplier Device Package=0805, Supplier Part Number 1=311-523KCRCT-ND, Temperature Coefficient=±100ppm/°C, Tolerance=±1%, ComponentLink1Description=Datasheet, ComponentLink1URL=https://www.yageo.com/upload/media/product/productsearch/datasheet/rchip/PYu-RC_Group_51_RoHS_L_10.pdf, ComponentLink2Description="DigiKey Link", ComponentLink2URL=http://digikey.com/product-detail/en/yageo/RC0805FR-07523KL/311-523KCRCT-ND/730970, Composition="Thick Film", Features="Moisture Resistant", Height - Seated (Max)="0.024\" (0.60mm)", LastUpdated="2020-09-02 1:15:04 AM", Lifecycle Status=Active, Minimum Order=1, Number of Terminations=2, Package / Case="0805 (2012 Metric)", Packaging=CutTape, Part Number=RC0805FR-07523KL, Part Status=Active, PartId=36890, Price=0.10, Series=RC, Size / Dimension="0.079\" L x 0.049\" W (2.00mm x 1.25mm)", Supplier 1=DigiKey
R36: library part RC0805FR-07154KL, "RES SMD 154K OHM 1% 1/8W 0805", Device Package="0805 (2012 Metric)", Manufacturer=Yageo, Operating Temperature="-55°C ~ 155°C", Power (Watts)="0.125W, 1/8W", Supplier Device Package=0805, Supplier Part Number 1=311-154KCRCT-ND, Temperature Coefficient=±100ppm/°C, Tolerance=±1%, ComponentLink1Description=Datasheet, ComponentLink1URL=https://www.yageo.com/upload/media/product/productsearch/datasheet/rchip/PYu-RC_Group_51_RoHS_L_10.pdf, ComponentLink2Description="DigiKey Link", ComponentLink2URL=http://digikey.com/product-detail/en/yageo/RC0805FR-07154KL/311-154KCRCT-ND/730563, Composition="Thick Film", Features="Moisture Resistant", Height - Seated (Max)="0.024\" (0.60mm)", LastUpdated="2020-09-02 1:15:04 AM", Lifecycle Status=Active, Minimum Order=1, Number of Terminations=2, Package / Case="0805 (2012 Metric)", Packaging=CutTape, Part Number=RC0805FR-07154KL, Part Status=Active, PartId=37017, Price=0.10, Resistance="154 kOhms", Series=RC, Size / Dimension="0.079\" L x 0.049\" W (2.00mm x 1.25mm)", Supplier 1=DigiKey
SW1: library part CMP-00012-1, "Switch DIP OFF ON SPST 1 Raised Slide 0.1A 24VDC Gull Wing 1000Cycles SMD Tube"
TP1 TP2 TP3 TP4 TP5 TP6 TP7 TP8 TP9 TP10 TP11 TP12 TP13 TP14 TP15 TP16 TP17 TP18 TP19 TP20 TP23 TP24 TP25 TP26 TP27: library part TP1
U1 U6 U8: library part CMP-00006-1, "TEXAS INSTRUMENTS   LP339M/NOPB   LOW POWER COMPARATOR, QUAD, 8 uS, SOIC-14", PartId=1
U2: library part CMP-00003-1, "TEXAS INSTRUMENTS - SN74LS04D - HEX INVERTER, SMD, 74LS04, SOIC14", Case/Package=SOIC, High Level Output Current=-400uA, Low Level Output Current=8mA, Max Operating Temperature=70°C, Max Supply Voltage=5.25V, Min Operating Temperature=0°C, Min Supply Voltage=4.75V, Operating Supply Voltage=5V, Package Quantity=50, Height=1.58mm, Lead Free="Lead Free", Length=8.65mm, Logic Function=Buffer,Inverter, Mount="Surface Mount", Number of Bits=6, Number of Circuits=6, Number of Elements=6, Number of Gates=6, Number of Inputs=1, Number of Pins=14, Output Current=8mA, Packaging=Rail/Tube, Part Number=SN74LS04D, Propagation Delay=15ns, Radiation Hardening=No, REACH SVHC="No SVHC", RoHS Compliant=Yes, Schmitt Trigger Input=No, Series=74LS, Technology=BIPOLAR, Turn-On Delay Time=15ns, Weight=0.004564oz, Width=3.91mm
U3: library part CMP-00004-1, "OR Gate 4-Element 2-IN CMOS 14-Pin SOIC T/R", PartId=2
U4: library part CMP-00007-1, "TEXAS INSTRUMENTS - CD4081BM96 - AND Gate, CD4081, 8 Input, 6.8 mA, 3 V to 18 V, SOIC-14"
U5 U7: library part CMP-00009-1, "Programmable Delay Block 6-Pin TSOT-23 T/R"
U9: library part CMP-00008-2, "IC, QUAD NAND R/S-LATCH, 3-STATE, SOP-16, FULL REEL; Latch Type:SR; Output Current:-; Propagation Delay:50ns; Supply Voltage Min:3V; Supply Voltage Max:18V; Logic Case Style:SOIC; No. of Pins:16; No. of Bits:4bit ;RoHS Compliant: Yes"
U10: library part CMP-00011-1, "IC OSC SGL TIMER 100KHZ 8-SOIC"
U11: library part CMP-00010-1, "800-mA 15-V linear voltage regulator 4-SOT-223 0 to 125"

## Free pads (board coordinates)
  round 1.524 hole 3.556 unplated: 2(2.54,69.342) 2(17.653,68.707) 2(18.542,5.461) 2(45.466,68.453) 2(48.006,3.683)
  round 1.524 hole 0.762: 3(22.098,63.5)

## Via types
v1: diameter 1.27, hole 0.711, Top Layer to Bottom Layer, 39 vias

## Nets (pads, with @x,y where several pads share a name; then routed paths per layer and width w, separated by ;. In a path a pad name is that pad's centre, name@x,y a point inside that pad or via, vN(x,y) a via of type N, cw(c..) or ccw(c..) an arc to the next point about the centre after c; other vN are vias at no path point)
BOTH_ON: TP15.1 U4.3 U7.1 | length 9
  Top Layer w0.127: U4.3 26.543,66.802 27.178,67.437 30.48,67.437 TP15.1 31.496,66.421 U7.1@34.189,66.421 ; U7.1@34.25,66.421 U7.1@34.189,66.421 ; U7.1 U7.1@34.189,66.421
BOTH_TRIG: TP17.1 U7.6 U8.5 | length 31.1
  Top Layer w0.127: U7.6 37.17,66.482 38.247,65.405 40.259,65.405 41.529,64.135 TP17.1 ; U8.5 38.735,45.085 34.798,49.022 34.798,55.631 37.846,58.679 37.846,60.706 40.005,62.865 TP17.1@41.021,62.865
BSE1: J1.4 R24.2 TP26.1 U1.8 U6.9 | length 62
  Top Layer w0.127: J1.4@13.97,11.303 TP26.1 17.142,11.303 17.498,11.659 17.501,11.659 23.241,17.399 ; U1.8 21.463,30.68 23.241,28.902 23.241,17.399 ; R24.2 24.126,18.045 23.887,18.045 23.241,17.399 ; v1(29.464,26.543) U6.9
  Bottom Layer w0.127: J1.4 12.319,12.827 12.319,17.145 12.7,17.526 12.879,17.705 17.347,17.705 17.653,17.399 27.305,17.399 28.575,18.669 28.575,25.963 29.155,26.543 v1(29.464,26.543)
BSE1_ADJ: R3.2 TP3.1 U1.9 | length 34.3
  Top Layer w0.127: TP3.1 4.572,52.324 R3.2 ; U1.9 v1(22.733,33.02)
  Bottom Layer w0.127: R3.2 6.604,49.149 v1(22.733,33.02)
BSE1D: TP11.1 U2.6 U3.5 | length 16.4
  Top Layer w0.127: U2.6 22.733,46.917 22.152,47.498 18.923,47.498 TP11.1 17.78,49.858 23.791,55.869 24.003,56.081 U3.5
BSE2: J1.3 R23.2 TP27.1 U1.10 U6.11 | length 68.8
  Top Layer w0.127: J1.3@13.97,8.763 TP27.1 17.031,9.03 17.539,9.03 26.035,17.526 ; U1.10 24.003,30.68 26.035,28.648 26.035,25.781 26.035,17.526 ; R23.2 27.008,18.132 26.641,18.132 26.035,17.526 ; v1(29.464,24.003) U6.11
  Bottom Layer w0.127: J1.3 14.351,8.636 16.002,10.287 16.002,11.991 15.42,12.573 13.335,12.573 12.7,13.208 12.7,17.018 13.081,17.399 17.018,17.399 17.526,16.891 27.686,16.891 29.464,18.669 v1(29.464,24.003)
BSE2_ADJ: R4.2 TP4.1 U1.11 | length 46.4
  Top Layer w0.127: TP4.1@1.27,66.04 4.191,63.119 R4.2 ; v1(24.511,33.528) 25.273,32.766 U1.11
  Bottom Layer w0.127: R4.2 6.604,60.198 12.065,54.737 12.065,45.974 v1(24.511,33.528)
BSE2D: TP12.1 U2.8 U3.6 | length 21.4
  Top Layer w0.127: U2.8 21.463,44.831 19.304,46.99 17.399,46.99 TP12.1 16.118,48.757 16.118,49.466 22.733,56.081 U3.6
BSE_ON: TP14.1 U3.4 U4.2 | length 15.4
  Top Layer w0.127: U3.4 25.273,56.781 26.785,58.293 29.464,58.293 30.988,59.817 30.988,60.325 31.369,60.706 TP14.1@31.126,60.949 ; U4.2 27.813,65.405 30.962,62.256 TP14.1
FLAG_OUT_N: J1.2 R41.2 TP23.1 U9.13 | length 46.4
  Top Layer w0.127: v1(42.164,20.447) 42.418,20.701 TP23.1 43.815,22.098 44.704,21.209 45.96,21.209 46.618,21.868 46.718,21.868 47.23,22.379 R41.2 47.23,24.243 47.752,24.765 U9.13
  Bottom Layer w0.127: J1.2 16.707,8.833 16.707,11.881 17.907,13.081 26.162,13.081 27.559,14.478 29.718,14.478 35.687,20.447 v1(42.164,20.447)
GND: C1.2 C2.2 C3.1 C4.1 C5.1 C6.2 C7.2 J1.7 pad.2 pad.3 R1.3 R2.3 R3.3 R4.3 R22.1 R23.1 R24.1 R25.1 R26.1 R28.1 R30.1 R32.1 R33.1 R35.1 R36.1 R37.1 R39.1 R41.1 U1.12 U2.7 U2.13 U3.7 U3.8 U3.9 U3.12 U3.13 U4.7 U5.2 U6.12 U7.2 U8.12 U9.6 U9.7 U9.8 U9.11 U9.12 U9.14 U9.15 U10.1 U11.1 | length 184.3
  Top Layer w0.127: R26.1 v1(19.05,22.352) ; v1@19.812,55.88 20.363,56.431 U3.7 ; U2.7 21.463,46.217 23.611,44.069 25.4,44.069 27.178,42.291 27.189,42.291 27.813,41.667 U2.13 v1(27.813,39.751) ; U3.8 21.463,50.831 22.891,49.403 26.532,49.403 26.567,49.438 26.959,49.438 v1(27.178,49.657) ; U4.7 21.463,64.389 22.098,63.754 pad.3 ; R25.1 v1(21.844,22.352) ; U3.9 22.733,50.831 23.526,50.038 26.416,50.038 26.578,49.876 v1@26.959,49.876 ; R24.1 v1(24.638,22.352) ; U1.12 26.543,23.241 v1(27.432,22.352) ; U3.12 26.543,50.292 v1@26.959,49.876 ; R23.1 v1(27.432,22.352) ; U3.13 27.813,50.292 v1(27.178,49.657) ; U6.12 30.995,22.571 29.412,22.571 29.193,22.352 v1(27.432,22.352) ; R22.1@31.496,30.861 28.067,27.432 28.067,23.241 27.432,22.606 v1(27.432,22.352) ; C3.1 33.074,68.361 33.074,67.637 33.621,67.09 34.831,67.09 35.306,66.615 35.306,64.776 34.55,65.532 U7.2 ; R33.1 34.036,57.658 34.163,57.531 34.544,57.531 34.555,57.52 35.168,57.52 v1(35.306,57.658) 35.509,57.455 36.122,57.455 36.576,57.909 R32.1 ; R37.1 36.761,49.588 v1(38.1,50.927) 38.1,51.212 39.747,52.859 R39.1 R39.1@39.451,53.255 ; U5.2@36.83,35.266 36.83,34.023 37.452,33.401 v1(37.465,33.401) 38.848,32.018 R36.1 ; R39.1@39.451,52.911 R39.1@39.451,53.255 ; U10.1 40.143,58.972 40.894,58.221 40.894,57.277 40.64,57.023 38.989,57.023 38.354,56.388 38.354,53.961 39.056,53.259 39.448,53.259 R39.1@39.451,53.255 ; R35.1 42.277,35.841 42.788,35.33 42.852,35.33 42.926,35.255 42.926,32.893 v1(42.799,32.766) ; U9.8 42.672,32.639 v1(42.799,32.766) ; C4.1 43.18,40.513 43.18,40.298 42.506,39.624 42.475,39.624 42.474,39.622 41.908,39.622 41.293,39.007 41.293,35.542 42.291,34.544 42.291,33.32 42.799,32.812 v1(42.799,32.766) ; C5.1 43.815,65.532 41.91,67.437 41.91,69.331 v1@42.545,69.966 ; U9.7 43.942,31.115 43.018,32.039 43.018,32.547 v1(42.799,32.766) ; U9.11 45.212,24.765 v1@44.069,23.622 ; U9.6 45.212,31.115 44.577,31.75 44.069,31.75 43.053,32.766 v1(42.799,32.766) ; R41.1 45.438,22.521 44.789,22.521 v1(43.815,23.495) ; U8.12 45.901,47.625 46.112,47.837 U8.12@46.112,47.886 ; C6.2 46.051,64.566 46.051,65.455 45.609,65.897 44.085,65.897 42.545,67.437 v1@42.545,69.966 ; U9.12 46.482,24.765 45.339,23.622 v1@44.069,23.622 ; U9.14 49.022,25.715 48.786,25.952 48.784,25.952 48.447,26.289 42.037,26.289 41.783,26.035 41.783,24.511 42.291,24.003 43.156,24.003 v1@43.664,23.495 ; U9.15 50.292,25.715 49.337,26.67 41.91,26.67 41.402,26.162 41.402,24.331 42.238,23.495 v1@43.664,23.495 ; C7.2 51.762,69.25 51.762,70.412 51.054,71.12 43.434,71.12 v1(42.545,70.231) v1@42.545,69.966 ; v1@26.959,49.876 v1(27.178,49.657) ; v1@43.664,23.495 v1(43.815,23.495) ; v1(43.815,23.495) 43.942,23.622 v1@44.069,23.622
  Top Layer w0.254: v1(35.306,57.658) 35.306,64.776
  other v1: 28.829,9.652 25.146,10.922 27.94,13.335 46.99,49.022 46.99,50.927 19.558,55.626
NetC5_2: C5.2 U10.5 | length 9.9
  Top Layer w0.127: C5.2 43.815,62.611 43.815,62.103 42.418,60.706 42.418,56.982 44.237,55.162 U10.5
NetC6_1: C6.1 U10.7 | length 6.6
  Top Layer w0.127: 45.698,57.785 46.609,57.785 46.99,58.166 46.99,61.468 46.308,62.15 46.308,62.709 C6.1
NetC7_1: C7.1 R38.1 U10.6 | length 18
  Top Layer w0.127: U10.6 46.272,56.432 47.625,57.785 47.625,65.278 47.879,65.532 47.879,67.564 48.038,67.723 ; R38.1@49.679,66.614 49.679,66.794 49.414,67.06 49.234,67.06 48.571,67.723 48.038,67.723 ; C7.1 49.619,68.707 49.022,68.707 48.038,67.723
NetC8_1: C8.1 R37.2 U10.2 | length 10
  Top Layer w0.127: R37.2 35.941,52.241 36.195,52.495 ; C8.1 35.941,52.749 36.195,52.495 ; U10.2@39.624,57.912 38.989,57.277 38.31,57.277 37.084,56.051 37.084,52.749 36.83,52.495 36.195,52.495
NetR17_1: R17.1 R22.2 U6.4 U6.6 U6.8 U6.10 | length 21.3
  Top Layer w0.127: U6.10 31.369,25.485 31.827,25.485 34.417,28.074 34.477,28.134 ; U6.8 33.427,27.813 34.477,28.863 ; 34.403,29.591 34.477,29.591 ; R17.1@35.701,30.761 R17.1 ; U6.4 36.057,24.003 34.477,25.583 34.477,28.134 ; U6.6 36.057,26.543 35.846,26.755 35.846,26.765 34.477,28.134
  Top Layer w0.254: R22.2@33.133,30.761 33.581,30.313 33.755,30.313 34.477,29.591 ; 34.477,28.134 34.477,28.863 34.477,29.591 ; R17.1@35.828,30.761 35.38,30.313 35.199,30.313 34.477,29.591
NetR18_1: R18.1 TP8.1 U1.13 U2.9 | length 29
  Top Layer w0.127: R18.1@16.764,37.592 R18.1@17,37.828 ; U2.9 22.733,40.967 21.824,40.058 21.029,40.058 20.193,40.894 20.193,41.91 19.685,42.418 18.669,42.418 16.764,40.513 TP8.1 R18.1 16.873,37.941 26.022,37.941 27.051,36.912 27.051,32.142 27.813,31.38 U1.13
NetR20_1: R20.1 TP7.1 U1.14 U2.5 | length 26.9
  Top Layer w0.127: U2.5 24.003,46.217 24.215,46.006 24.225,46.006 24.765,45.466 27.94,45.466 28.448,45.974 28.448,47.17 28.661,47.383 29.706,47.383 32.004,45.085 32.004,41.288 31.592,40.876 31.592,40.228 28.448,37.084 28.448,34.211 29.083,33.576 U1.14 ; U1.14@29.295,31.592 U1.14@29.306,31.592
NetR27_1: R27.1 U8.8 | length 3.2
  Top Layer w0.127: U8.8 48.401,42.545 R27.1
NetR28_2: R28.2 U8.9 | length 4.2
  Top Layer w0.127: U8.9 45.901,43.815 48.03,45.944 48.03,45.985 48.541,46.496 R28.2
NetR29_1: R29.1 U8.10 | length 9.8
  Top Layer w0.127: U8.10 45.404,44.938 44.811,44.938 44.45,44.577 44.45,43.561 44.831,43.18 47.117,43.18 47.752,43.815 49.924,43.815 50.954,42.785 R29.1
NetR30_2: R30.2 U8.11 | length 6.2
  Top Layer w0.127: U8.11 46.482,46.355 47.498,47.371 50.052,47.371 50.415,47.008 50.443,47.008 50.927,46.523 R30.2@50.927,46.496
NetR31_2: R31.2 R32.2 U7.4 | length 7.6
  Top Layer w0.127: R32.2 38.481,62.583 38.481,63.373 ; U7.4 37.116,64.335 37.519,64.335 38.481,63.373 ; R31.2 39.497,63.701 39.169,63.373 38.481,63.373
NetR33_2: R33.2 U7.3 | length 4.8
  Top Layer w0.127: R33.2@33.412,61.203 33.425,61.203 33.907,60.721 R33.2@33.907,60.708 ; R33.2 R33.2@34.25,60.906 ; R33.2@34.25,60.799 R33.2@34.25,60.906 ; U7.3 R33.2@34.25,60.906
NetR34_2: R34.2 R35.2 U5.4 | length 5.5
  Top Layer w0.127: U5.4@37.903,38.309 37.903,37.971 38.663,37.211 39.396,37.211 ; R35.2 40.016,36.453 40.016,36.591 39.44,37.167 39.396,37.211 ; R34.2 40.527,38.254 39.484,37.211 39.396,37.211
NetR36_2: R36.2 U5.3 | length 3.5
  Top Layer w0.127: U5.3 37.78,35.474 39.218,34.036 39.991,34.036 R36.2
NetR40_2: R40.2 SW1.1 U10.3 | length 20.7
  Top Layer w0.127: U10.3@39.749,56.388 U10.3 39.984,56.241 40.488,56.241 42.5,54.229 43.335,54.229 ; R40.2@44.831,52.733 44.264,53.3 44.264,53.48 44.162,53.582 43.982,53.582 43.335,54.229 ; SW1.1 49.911,63.233 48.108,61.43 48.108,55.728 46.915,54.535 43.763,54.535 43.457,54.229 43.335,54.229
NetU2_11: U2.11 U8.1 U8.2 U8.4 U8.6 | length 32.3
  Top Layer w0.127: v1(25.273,39.751) U2.11 ; v1(38.481,41.148) 38.655,41.322 40.56,41.322 41.529,42.291 41.529,43.349 41.042,43.836 ; U8.6 40.322,43.836 41.042,43.836 ; U8.4 40.322,46.376 41.042,46.376 ; U8.2 40.428,49.022 41.148,49.022 ; U8.1 41.148,50.165 41.529,49.784 41.529,49.403 41.148,49.022 ; 41.042,43.836 41.529,44.323 41.529,45.889 41.042,46.376 ; 41.042,46.376 41.529,46.863 41.529,48.641 41.148,49.022
  Bottom Layer w0.127: v1(25.273,39.751) 25.273,39.497 25.908,38.862 32.258,38.862 32.385,38.735 36.068,38.735 v1(38.481,41.148)
RESET: R40.1 SW1.2 TP20.1 U9.4 | length 35.4
  Top Layer w0.127: R40.1 46.55,53.213 49.911,53.213 ; U9.4 47.752,32.258 46.395,33.615 46.395,34.4 TP20.1 50.061,34.567 52.705,37.211 52.705,51.181 51.181,52.705 50.419,52.705 49.911,53.213 ; SW1.2 49.911,53.213
SENSOR_DC: TP16.1 U5.1 U6.1 U6.2 U6.13 U6.14 | length 32.6
  Top Layer w0.127: U6.14 32.893,20.193 33.782,21.082 33.782,21.717 ; U6.13 33.147,21.463 33.782,22.098 ; 34.29,22.606 34.29,21.463 35.56,20.193 U6.1@36.227,20.193 ; 34.734,23.05 34.798,22.987 34.798,22.352 35.666,21.484 36.386,21.484 U6.2 ; 36.016,20.584 36.016,20.405 U6.1@36.227,20.193 ; U6.1 U6.1@36.227,20.193
  Top Layer w0.254: 33.782,21.717 33.782,22.098 34.29,22.606 34.734,23.05 35.052,23.368 TP16.1@37.846,23.368 ; U5.1@35.88,35.266 35.88,33.081 36.576,32.385 36.576,29.464 37.338,28.702 38.354,28.702 39.116,27.94 39.116,24.892 39.116,24.139 38.481,23.504 TP16.1
SENSOR_TRIG: TP18.1 U5.6 U8.7 | length 7.6
  Top Layer w0.127: U5.6 35.88,40.833 TP18.1 39.443,42.037 39.951,42.545 U8.7
TPS1: J1.6 R26.2 TP24.1 U1.6 U6.5 | length 56.9
  Top Layer w0.127: J1.6@13.97,16.383 TP24.1 16.777,16.383 17.653,17.259 ; R26.2 18.95,18.556 17.653,17.259 ; U1.6 22.733,35.93 19.558,32.755 19.558,24.638 17.653,22.733 17.653,17.259 ; U6.5 v1(37.973,25.273)
  Bottom Layer w0.127: J1.6 29.845,16.256 33.99,20.401 33.99,21.29 v1(37.973,25.273)
TPS1_ADJ: R1.2 TP1.1 U1.7 | length 23.7
  Top Layer w0.127: TP1.1 4.572,31.115 R1.2 ; R1.2@6.604,30.861 15.494,30.861 18.669,34.036 19.569,34.036 21.463,35.93 U1.7
TPS1D: TP9.1 U2.4 U3.2 | length 19.1
  Top Layer w0.127: U2.4 25.273,46.917 24.184,48.006 20.574,48.006 TP9.1 19.812,50.67 22.99,53.848 25.58,53.848 27.813,56.081 U3.2
TPS1D_N: R21.1 TP5.1 U1.1 U2.3 | length 20.3
  Top Layer w0.127: U2.3 26.543,46.917 26.755,47.129 26.809,47.129 27.432,47.752 31.61,47.752 R21.1@32.78,46.582 ; U1.1 29.803,36.28 TP5.1 33.655,40.358 32.88,41.132 32.88,46.382 R21.1
TPS2: J1.5 R25.2 TP25.1 U1.5 U6.7 | length 64.8
  Top Layer w0.127: J1.5@13.97,13.843 TP25.1 17.031,13.843 20.453,17.266 ; R25.2 21.744,18.556 20.453,17.266 ; U1.5 24.003,35.93 20.453,32.381 20.453,17.266 ; U6.7 37.283,27.813 37.664,27.432 v1(37.973,27.432)
  Bottom Layer w0.127: J1.5 25.908,13.716 27.305,15.113 29.591,15.113 38.862,24.384 38.862,26.543 v1(37.973,27.432)
TPS2_ADJ: R2.2 TP2.1 U1.4 | length 30.9
  Top Layer w0.127: TP2.1 4.699,41.529 R2.2 6.604,40.005 11.811,34.798 19.05,34.798 20.447,36.195 20.447,36.83 21.05,37.433 24.47,37.433 25.273,36.63 U1.4
TPS2D: TP10.1 U2.2 U3.1 | length 15.6
  Top Layer w0.127: U2.2 27.813,46.217 27.316,45.72 26.25,45.72 25.908,46.062 25.908,47.117 27.191,48.4 28.461,48.4 28.702,48.641 28.473,48.87 28.473,55.471 29.083,56.081 U3.1 U3.1@29.083,56.854
TPS2D_N: R19.1 TP6.1 U1.2 U2.1 | length 31.9
  Top Layer w0.127: U1.2 27.813,36.63 25.849,38.594 19.177,38.594 R19.1 TP6.1 21.717,38.862 28.956,38.862 29.972,39.878 29.972,45.339 29.305,46.006 29.295,46.006 29.083,46.217 U2.1
TPS_ON: TP13.1 U3.3 U4.1 | length 15.7
  Top Layer w0.127: U3.3 26.543,56.781 27.42,57.658 31.115,57.658 31.877,58.42 31.877,60.694 ccw(c30.962,60.96) 31.877,61.226 31.877,61.722 30.988,62.611 TP13.1 30.61,64.389 29.383,65.615 29.319,65.615 29.083,65.852 U4.1
TRIG_N: TP19.1 U2.10 U9.3 | length 34.5
  Top Layer w0.127: v1(23.368,39.751) 24.003,40.386 U2.10 ; v1(44.069,34.544) 44.139,34.474 44.139,33.718 44.789,33.069 44.789,32.808 45.974,31.623 45.974,29.718 46.609,29.083 47.94,29.083 49.022,30.165 U9.3
  Bottom Layer w0.127: v1(23.368,39.751) 24.666,38.453 32.413,38.453 36.322,34.544 v1(44.069,34.544)
VCC5V: C2.1 C3.2 C4.2 C8.2 R1.1 R2.1 R3.1 R4.1 R17.2 R18.2 R19.2 R20.2 R21.2 R27.2 R29.2 R31.1 R34.1 R38.2 R39.2 U1.3 U2.14 U3.14 U4.5 U4.6 U4.8 U4.9 U4.12 U4.13 U4.14 U5.5 U6.3 U7.5 U8.3 U9.5 U9.16 U10.4 U10.8 U11.2 U11.4 | length 360.1
  Top Layer w0.127: R2.1 10.668,40.513 ; R3.1 10.668,51.308 ; R4.1 9.906,59.817 13.462,59.817 ; 10.668,49.149 13.716,46.101 v1(17.399,46.101) ; v1(12.192,36.449) 12.467,36.449 16.397,36.449 R18.2 ; R19.2 17.685,36.957 18.415,37.687 25.486,37.687 26.543,36.63 U1.3 ; U4.8 21.463,59.436 22.225,58.674 v1@23.313,58.674 ; U4.9 22.733,59.309 23.368,58.674 v1(23.622,58.674) v1@23.705,58.757 ; U4.6 22.733,65.278 23.368,64.643 23.368,60.218 23.749,59.837 23.749,58.801 v1@23.705,58.757 ; U4.5 24.003,65.405 25.763,63.645 25.763,60.073 24.447,58.757 v1@23.705,58.757 ; 25.717,58.737 28.258,58.737 29.083,59.563 U4.14 ; U4.12 26.543,59.563 26.162,59.182 27.178,59.182 27.813,59.817 U4.13 ; v1(26.67,44.577) 29.083,42.164 U2.14 ; U3.14 31.855,51.181 ; 33.655,70.485 34.582,69.558 C3.2 34.798,68.237 34.798,67.483 35.941,66.34 35.941,66.161 36.57,65.532 U7.5 ; R20.2 34.544,44.069 34.925,43.688 34.925,42.826 ; R21.2 35.306,46.482 35.623,46.164 35.623,46.101 ; C8.2 35.941,55.88 38.354,58.293 38.354,60.325 39.243,61.214 41.679,61.214 42.545,62.08 42.545,64.008 41.275,65.278 41.275,70.104 40.894,70.485 41.91,71.501 51.816,71.501 52.832,70.485 52.832,67.854 R38.2@51.816,66.838 ; U6.3 36.757,22.733 38.608,20.882 38.608,16.637 ; C2.1 C2.1@37.548,13.208 ; 37.211,70.485 39.497,68.199 R31.1 ; R17.2 37.451,30.761 39.751,28.461 ; 37.84,37.084 36.83,38.094 U5.5 36.83,38.694 38.268,40.132 41.364,40.132 C4.2 ; U10.4 40.596,55.162 41.455,54.303 41.455,53.002 R39.2 41.497,52.859 37.43,48.791 37.43,48.352 v1(37.211,48.133) 37.362,48.133 37.87,47.625 U8.3 ; 40.64,15.875 42.672,15.875 51.562,24.765 U9.16 ; v1(43.307,58.039) 44.24,58.972 U10.8 ; 44.958,37.211 44.958,34.29 46.482,32.766 U9.5
  Top Layer w0.191: 25.717,58.737 26.162,59.182
  Top Layer w0.254: v1(12.192,36.449) 12.192,38.989 10.668,40.513 10.668,49.149 10.668,51.308 10.668,57.023 13.462,59.817 19.939,59.817 20.32,59.436 ; v1@12.467,36.449 12.975,36.957 17.685,36.957 ; v1@23.368,58.674 22.606,57.912 21.844,57.912 20.32,59.436 ; v1@23.876,58.674 24.257,58.293 25.273,58.293 25.717,58.737 ; v1@38.989,35.433 v1(38.989,35.684) ; 40.894,70.485 37.211,70.485 33.655,70.485 24.003,70.485 20.32,66.802 20.32,59.436
  Top Layer w0.508: v1@30.598,55.381 31.855,54.124 31.855,51.181 31.855,49.679 v1(33.147,48.387) 34.671,48.387 35.623,47.434 35.623,46.164 ; 35.623,46.101 35.623,43.525 34.925,42.826 34.925,37.846 35.687,37.084 37.84,37.084 38.1,37.084 38.843,36.341 38.843,35.83 v1(38.989,35.684) ; v1@38.989,35.433 39.624,34.798 41.021,34.798 41.402,34.417 41.402,29.591 40.767,28.956 40.246,28.956 39.751,28.461 39.751,16.333
  Bottom Layer w0.127: R1.1 11.049,28.575 12.192,29.718 v1(12.192,36.449) ; v1(17.399,46.101) 25.146,46.101 v1(26.67,44.577) ; v1(33.147,48.387) v1@33.274,48.26 ; v1@37.084,48.26 v1(37.211,48.133) 43.053,53.975 43.053,57.785 v1(43.307,58.039)
  Bottom Layer w0.254: v1@33.274,48.26 v1@37.084,48.26 ; v1(38.989,35.684) 44.707,41.402 v1(46.863,41.402)
  Bottom Layer w0.508: v1(23.622,58.674) 27.178,58.674 v1(30.353,55.499)
VCC12V: C1.1 J1.1 U11.3
pads on no net: U2.12 U3.10 U3.11 U4.4 U4.10 U4.11 U8.13 U8.14 U9.1 U9.2 U9.9 U9.10

## Polygon pours and split planes (outlines as drawn)
VCC12V on Top Layer "VCC12V_L01_P000" (solid, pour order 0): 17.145,2.794 21.145,2.794 22.415,4.064 28.194,4.064 29.21,3.048 32.258,3.048 32.258,1.143 26.162,1.143 25.527,0.508 14.859,0.508 12.319,3.048 12.319,4.826 15.113,4.826
GND on Top Layer "GND_L01_P001" (solid, pour order 1): 22.225,4.445 21.336,5.334 21.336,11.43 26.924,17.018 32.639,17.018 34.798,14.859 34.798,11.049 32.258,8.509 32.258,5.842 29.718,5.842 28.321,4.445
GND on Top Layer "GND_L01_P006" (solid, pour order 6): 52.324,50.927 52.324,47.879 51.816,47.371 50.292,47.371 50.038,47.625 46.99,47.625 46.355,46.99 44.704,46.99 44.704,47.117 44.069,47.752 44.069,50.927 45.085,51.943 51.308,51.943
VCC5V on Top Layer "VCC5V_L01_P003" (solid, remove dead copper, pour order 3): 35.052,14.859 37.211,17.018 40.132,17.018 40.894,16.256 40.894,14.351 39.116,12.573 39.116,2.413 34.925,2.413 34.036,3.302 29.464,3.302 28.575,4.191 29.972,5.588 32.512,5.588 32.512,8.382 35.052,10.922
VCC5V on Top Layer "VCC5V_L01_P004" (solid, pour order 4): 51.943,41.91 52.324,41.529 52.324,37.338 51.689,36.703 43.942,36.703 43.307,37.338 41.656,37.338 41.402,37.592 41.402,39.243 41.529,39.243 41.656,39.37 44.196,39.37 45.593,40.767 45.593,41.91 45.847,42.164 47.625,42.164 47.879,41.91
GND on Bottom Layer "GND_L02_P005" (solid, remove dead copper, pour order 5): 0,71.882 53.467,71.882 53.213,0 0,0

## Silkscreen, mask and mechanical layers (free items; w line width, h text height)
Top Overlay:
  drawing of 13 lines, arcs and shapes, not listed
  text "BSPD 002" at 43.18,16.383 h1.52 r270
  text "L.L" at 40.894,12.319 h1.52 r270